# EAGLE board pic (EAGLE 5.01)
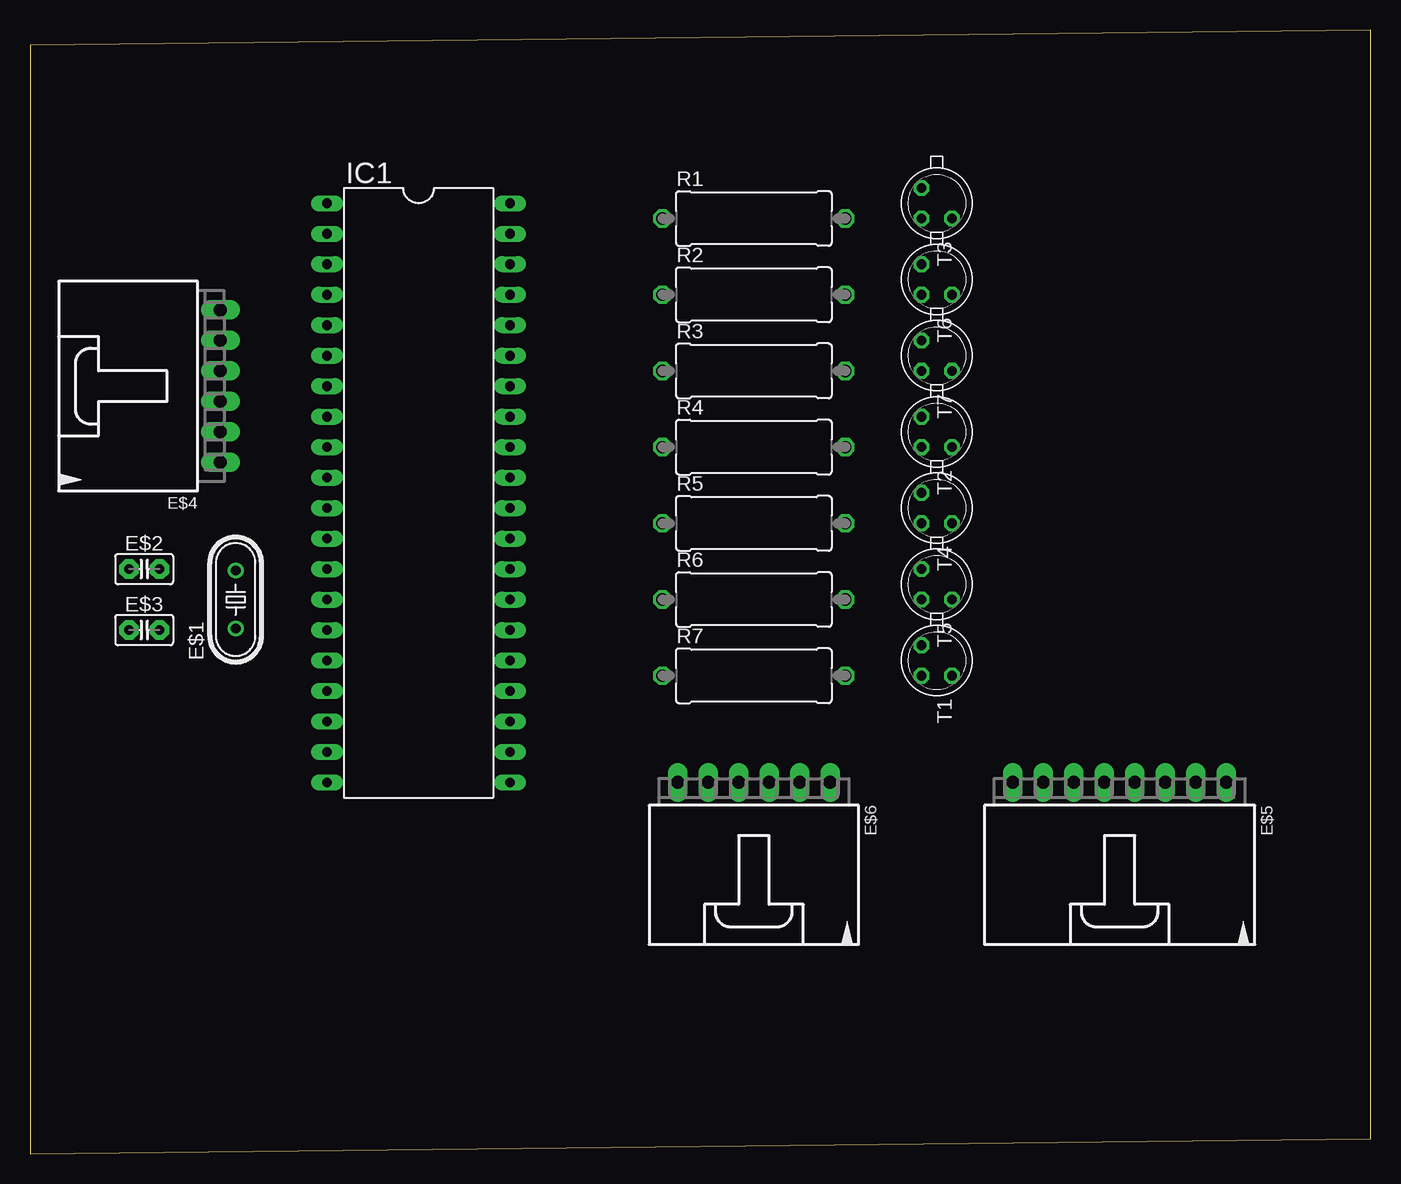
[diagram p0: board, top side]
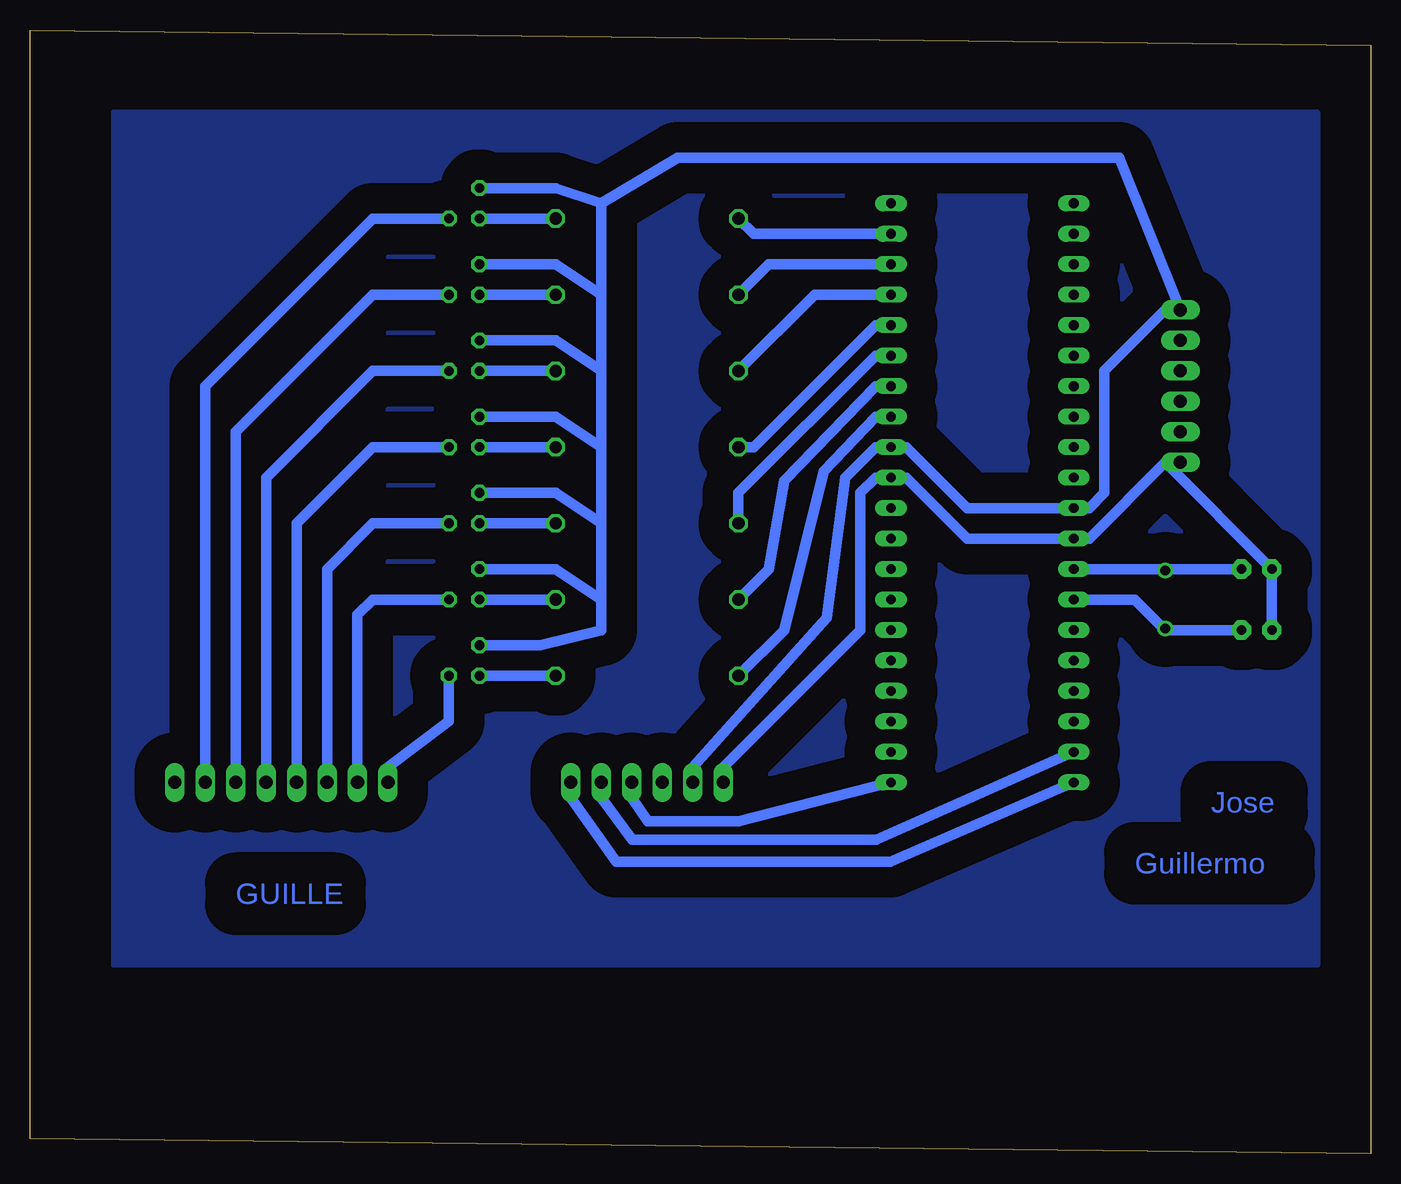
[diagram p1: board, bottom side, seen from below]

Size 111.74 x 93.65 mm. Coordinates in mm from the lower left corner, seen from the top.
Outline: 0,0 111.74,1.27 111.74,93.65 0,92.38 0,0
Copper layers (1*16): Top 0.035mm / dielectric 1.5mm / Bottom 0.035mm
Design rules "default *": minimum track width 35mil, minimum drill 24mil, track to track 12mil, track to pad 8mil, pad to pad 8mil, via to via 8mil, smd to smd 8mil, copper to edge 40mil, drill to drill 8mil, minimum pad ring 10mil, minimum via ring 8mil, stop-mask expansion 4mil, vias tented up to drill 0mil, thermal gap 10mil

## Footprints (pad centres in the part's own frame; a part is rotated, then mirrored left to right if it is on the bottom)
HC49/S = drill 0.813 round: 1 -2.413,0; 2 2.413,0
C2.5-2 = drill 0.813 pad 1.6 octagon: 1 -1.27,0; 2 1.27,0
70553-06 = drill 1.092 long: 1 -6.35,-7.62; 2 -3.81,-7.62; 3 -1.27,-7.62; 4 1.27,-7.62; 5 3.81,-7.62; 6 6.35,-7.62
70553-08 = drill 1.092 long: 1 -8.89,-7.62; 2 -6.35,-7.62; 3 -3.81,-7.62; 4 -1.27,-7.62; 5 1.27,-7.62; 6 3.81,-7.62; 7 6.35,-7.62; 8 8.89,-7.62
DIL40 = drill 0.813 long: 1 -24.13,-7.62; 2 -21.59,-7.62; 3 -19.05,-7.62; 4 -16.51,-7.62; 5 -13.97,-7.62; 6 -11.43,-7.62; 7 -8.89,-7.62; 8 -6.35,-7.62; 9 -3.81,-7.62; 10 -1.27,-7.62; 11 1.27,-7.62; 12 3.81,-7.62; 13 6.35,-7.62; 14 8.89,-7.62; 15 11.43,-7.62; 16 13.97,-7.62; 17 16.51,-7.62; 18 19.05,-7.62; 19 21.59,-7.62; 20 24.13,-7.62; 21 24.13,7.62; 22 21.59,7.62; 23 19.05,7.62; 24 16.51,7.62; 25 13.97,7.62; 26 11.43,7.62; 27 8.89,7.62; 28 6.35,7.62; 29 3.81,7.62; 30 1.27,7.62; 31 -1.27,7.62; 32 -3.81,7.62; 33 -6.35,7.62; 34 -8.89,7.62; 35 -11.43,7.62; 36 -13.97,7.62; 37 -16.51,7.62; 38 -19.05,7.62; 39 -21.59,7.62; 40 -24.13,7.62
P0613/15 = drill 1.016 octagon: 1 -7.62,0; 2 7.62,0
TO18 = drill 0.813 octagon: 1 -1.27,-1.27; 2 1.27,-1.27; 3 1.27,1.27

## Placement (x,y rotation side)
E$1  [HC49/S]  17.14,46.19 90 top
E$2  [C2.5-2]  9.52,48.73 0 top
E$3  [C2.5-2]  9.52,43.65 0 top
E$4  [70553-06]  8.25,63.97 90 top
E$5  [70553-08]  90.8,23.33 180 top
E$6  [70553-06]  60.32,23.33 180 top
IC1  PIC16F877P  [DIL40]  32.38,55.08 270 top
R1  [P0613/15]  60.32,77.94 0 top
R2  [P0613/15]  60.32,71.59 0 top
R3  [P0613/15]  60.32,65.24 0 top
R4  [P0613/15]  60.32,58.89 0 top
R5  [P0613/15]  60.32,52.54 0 top
R6  [P0613/15]  60.32,46.19 0 top
R7  [P0613/15]  60.32,39.84 0 top
T1  [TO18]  75.56,41.11 270 top
T2  [TO18]  75.56,60.16 270 top
T3  [TO18]  75.56,79.21 270 top
T4  [TO18]  75.56,53.81 270 top
T5  [TO18]  75.56,47.46 270 top
T6  [TO18]  75.56,72.86 270 top
T7  [TO18]  75.56,66.51 270 top

## Library data of the parts
E$1 = crystal
E$2 E$3 = capacitor-wima
E$4-E$6 = con-molex
IC1 = microchip
R1-R7 = resistor
T1-T7 = transistor

## Nets
S$1: R1.2 T3.2
S$2: R2.2 T6.2
S$3: R3.2 T7.2
S$4: R4.2 T2.2
S$5: R7.2 T1.2
S$6: R6.2 T5.2
S$7: R5.2 T4.2
S$8: E$5.8 T1.3
S$9: E$5.3 T6.3
S$10: E$5.4 T7.3
S$11: E$5.7 T5.3
S$13: E$5.2 T3.3
S$16: IC1.39 R1.1
S$17: IC1.38 R2.1
S$18: IC1.37 R3.1
S$19: IC1.36 R4.1
S$20: IC1.35 R5.1
S$21: IC1.34 R6.1
S$22: IC1.33 R7.1
S$23: E$1.2 E$2.2 IC1.13
S$24: E$1.1 E$3.2 IC1.14
S$25: E$6.3 IC1.21
S$28: IC1.20
S$29: E$6.2 IC1.19
S$30: E$5.5 T2.3
S$31: E$5.6 T4.3
VDD: E$4.6 E$6.5 IC1.11 IC1.32 T1.1 T2.1 T3.1 T4.1 T5.1 T6.1 T7.1
VSS: E$2.1 E$3.1 E$4.1 E$6.6 IC1.12 IC1.31

## Tracks (layer width: path | path; a pad name or v marks a point on that pad's centre or on a via)
S$1
  Bottom 0.889: R1.2 T3.2
S$2
  Bottom 0.889: R2.2 T6.2
S$3
  Bottom 0.889: R3.2 T7.2
S$4
  Bottom 0.889: R4.2 T2.2
S$5
  Bottom 0.889: R7.2 T1.2
S$6
  Bottom 0.889: R6.2 T5.2
S$7
  Bottom 0.889: R5.2 T4.2
S$8
  Bottom 0.889: T1.3 76.83,36.03 81.91,32.22 E$5.8
S$9
  Bottom 0.889: T6.3 83.18,71.59 94.61,60.16 94.61,32.22 E$5.3
S$10
  Bottom 0.889: T7.3 83.18,65.24 92.07,56.35 92.07,32.22 E$5.4
S$11
  Bottom 0.889: T5.3 83.18,46.19 84.45,44.92 E$5.7
S$13
  Bottom 0.889: T3.3 83.18,77.94 97.15,63.97 97.15,32.22 E$5.2
S$15
  pour Bottom (isolate 2.54): 104.77,86.83 4.44,86.83 4.44,15.71 104.77,15.71
S$16
  Bottom 0.889: R1.1 51.43,76.67 IC1.39
S$17
  Bottom 0.889: R2.1 50.16,74.13 IC1.38
S$18
  Bottom 0.889: R3.1 46.35,71.59 IC1.37
S$19
  Bottom 0.889: R4.1 51.43,58.89 41.27,69.05 IC1.36
S$20
  Bottom 0.889: R5.1 52.7,55.08 41.27,66.51 IC1.35
S$21
  Bottom 0.889: R6.1 50.16,48.73 48.87,56.09 41.27,63.97 IC1.34
S$22
  Bottom 0.889: R7.1 48.89,43.65 45.58,56.89 41.27,61.43 IC1.33
S$23
  Bottom 0.889: E$2.2 17.14,48.73 | 17.14,48.73 IC1.13 | 17.14,48.73 E$1.2
S$24
  Bottom 0.889: E$3.2 17.14,43.65 | 17.14,43.65 19.68,46.19 IC1.14 | 17.14,43.65 E$1.1
S$25
  Bottom 0.889: IC1.21 52.66,27.71 60.28,27.71 61.59,29.68 E$6.3
S$28
  Bottom 0.889: 66.67,29.68 62.9,24.35 40.04,24.35 IC1.20
S$29
  Bottom 0.889: IC1.19 41.23,26.17 61.55,26.17 64.13,29.68 E$6.2
S$30
  Bottom 0.889: T2.3 83.18,58.89 89.53,52.54 89.53,32.22 E$5.5
S$31
  Bottom 0.889: T4.3 83.18,52.54 86.99,48.73 86.99,32.22 E$5.6
VDD
  Bottom 0.889: E$6.5 56.51,32.22 45.35,44.69 43.81,56.35 41.27,58.89 IC1.32 38.73,58.89 33.65,53.81 IC1.11 23.49,53.81 22.22,55.08 22.22,65.24 17.14,70.32 E$4.6 20.95,83.02 57.78,83.02 64.13,79.21 | T3.1 67.94,80.48 64.13,79.21 | T6.1 67.94,74.13 64.13,71.59 | 64.13,79.21 64.13,71.59 | T7.1 67.94,67.78 64.13,65.24 | 64.13,71.59 64.13,65.24 | T2.1 67.94,61.43 64.13,58.89 | 64.13,65.24 64.13,58.89 | T4.1 67.94,55.08 64.13,52.54 | 64.13,58.89 64.13,52.54 | T5.1 67.94,48.73 64.13,46.19 | T1.1 69.21,42.38 64.13,43.65 64.13,46.19 | 64.13,52.54 64.13,46.19
VSS
  Bottom 0.889: E$6.6 53.97,32.22 42.54,43.65 42.54,55.08 41.27,56.35 IC1.31 38.73,56.35 33.65,51.27 IC1.12 23.49,51.27 17.14,57.62 | 17.14,57.62 E$4.1 | 17.14,57.62 E$2.1 E$3.1

## Text on the board
Bottom: Jose | Guillermo | GUILLE